# EAGLE board accelerometer_level (EAGLE 6.4)
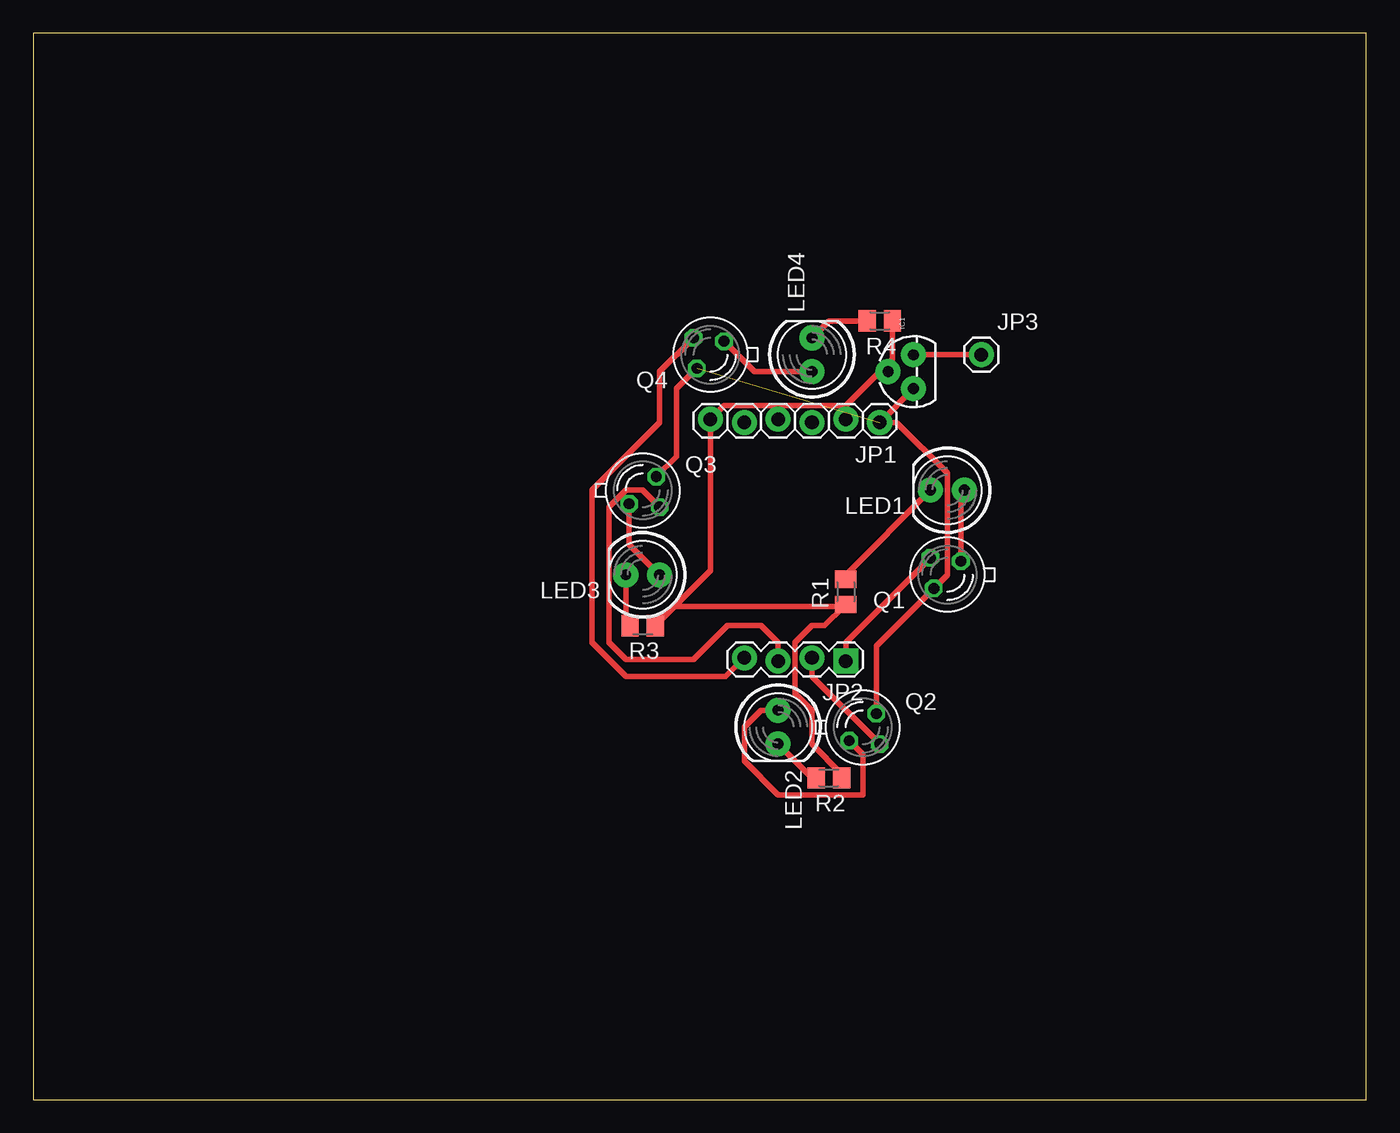
[diagram p0: board, top side]

Size 100 x 80 mm. Coordinates in mm from the lower left corner, seen from the top.
Outline: 0,0 100,0 100,80 0,80 0,0
Copper layers (1*16): Top 0.035mm / dielectric 1.5mm / Bottom 0.035mm
Design rules "default": minimum track width 10mil, minimum drill 24mil, track to track 8mil, track to pad 8mil, pad to pad 8mil, via to via 8mil, smd to smd 8mil, copper to edge 40mil, drill to drill 8mil, minimum pad ring 10mil, minimum via ring 8mil, stop-mask expansion 4mil, vias tented up to drill 0mil, thermal gap 10mil

## Footprints (pad centres in the part's own frame; a part is rotated, then mirrored left to right if it is on the bottom)
TO-92 = drill 0.813 pad 1.88: 1 -1.27,0; 2 0,1.905; 3 1.27,0
1X06_LOCK = drill 1.016 pad 1.88: 1 0,0; 2 2.54,-0.254; 3 5.08,0; 4 7.62,-0.254; 5 10.16,0; 6 12.7,-0.254
1X04_LOCK = drill 1.016 pad 1.88 square: 1 0,0.127 | drill 1.016 pad 1.88: 2 2.54,-0.127; 3 5.08,0.127; 4 7.62,-0.127
1X01 = drill 1.016 pad 1.88: 1 0,0
LED5MM = drill 0.813 pad 1.88: A -1.27,0; K 1.27,0
BP103 = drill 0.813 octagon: B 1.27,-1.27; C 1.016,1.016; E -1.016,-1.016
M0805 = smd 1.3 x 1.6: 1 -0.95,0; 2 0.95,0

## Placement (x,y rotation side)
IC1  [TO-92]  66.04,54.61 90 top
JP1  [1X06_LOCK]  63.5,50.8 180 top
JP2  [1X04_LOCK]  60.96,33.02 180 top
JP3  M01PTH  [1X01]  71.12,55.88 0 top
LED1  [LED5MM]  68.58,45.72 180 top
LED2  [LED5MM]  55.88,27.94 270 top
LED3  [LED5MM]  45.72,39.37 180 top
LED4  [LED5MM]  58.42,55.88 90 top
Q1  [BP103]  68.58,39.37 180 top
Q2  [BP103]  62.23,27.94 0 top
Q3  [BP103]  45.72,45.72 0 top
Q4  [BP103]  50.8,55.88 180 top
R1  100  [M0805]  60.96,38.1 90 top
R2  100  [M0805]  59.69,24.13 180 top
R3  100  [M0805]  45.72,35.56 180 top
R4  100  [M0805]  63.5,58.42 180 top

## Library data of the parts
IC1 = SparkFun-PowerIC
JP1-JP3 = SparkFun-Connectors
LED1-LED4 = SparkFun-LED
Q1-Q4 = opto-trans-siemens; OC_FARNELL: unknown; OC_NEWARK: unknown
R1-R4 = rcl

## Nets
+3V3A: IC1.1 JP1.1 Q1.C Q2.C Q3.C Q4.C
GND: IC1.2 JP1.6 R1.1 R2.1 R3.1 R4.1
N$1: LED1.K R1.2
N$2: LED2.K R2.2
N$3: LED3.K R3.2
N$4: LED4.K R4.2
N$5: LED1.A Q1.E
N$6: LED2.A Q2.E
N$7: LED3.A Q3.E
N$8: LED4.A Q4.E
N$9: JP2.1 Q1.B
N$10: JP2.2 Q2.B
N$11: JP2.3 Q3.B
N$12: JP2.4 Q4.B
N$14: IC1.3 JP3.1

## Tracks (layer width: path | path; a pad name or v marks a point on that pad's centre or on a via)
+3V3A  (1 unrouted)
  Top 0.406: Q4.C 48.26,53.34 48.26,48.26 Q3.C | IC1.1 JP1.1 64.77,50.8 68.58,46.99 68.58,39.37 Q1.C 63.25,34.04 Q2.C
GND
  Top 0.406: R3.1 48.1,36.99 | 48.1,36.99 50.8,39.69 JP1.6 51.82,52.07 60.96,52.07 63.5,54.61 | 63.5,54.61 IC1.2 64.77,54.61 | 63.5,54.61 64.45,55.56 R4.1 | R1.1 60.8,36.99 | 60.8,36.99 48.1,36.99 | 60.8,36.99 59.37,35.56 58.42,35.56 57.15,34.29 57.15,30.48 58.42,29.21 58.42,26.67 60.64,24.45 R2.1
N$1
  Top 0.406: LED1.K 60.96,39.37 R1.2
N$2
  Top 0.406: R2.2 58.42,24.13 LED2.K
N$3
  Top 0.406: R3.2 44.45,35.88 LED3.K
N$4
  Top 0.406: LED4.K 59.69,58.42 R4.2
N$5
  Top 0.406: LED1.A 69.6,45.47 Q1.E
N$6
  Top 0.406: Q2.E 62.23,25.91 62.23,22.86 55.88,22.86 53.34,25.4 53.34,27.94 54.61,29.21 LED2.A
N$7
  Top 0.406: LED3.A 44.7,41.66 Q3.E
N$8
  Top 0.406: Q4.E 54.1,54.61 LED4.A
N$9
  Top 0.406: Q1.B 60.96,34.29 JP2.1
N$10
  Top 0.406: JP2.2 58.42,31.75 Q2.B
N$11
  Top 0.406: Q3.B 45.72,45.72 44.45,45.72 43.18,44.45 43.18,34.29 44.45,33.02 49.53,33.02 52.07,35.56 54.61,35.56 55.88,34.29 JP2.3
N$12
  Top 0.406: JP2.4 51.94,31.75 44.45,31.75 41.91,34.29 41.91,45.72 46.99,50.8 46.99,54.61 Q4.B
N$14
  Top 0.406: JP3.1 IC1.3